# Altium PCB PCB.PcbDoc (part 3 of 3)
Units mm, origin at the board's own origin, x right, y up, seen from the top; angles counter-clockwise.
Board outline 68.58 x 53.34 mm, 4 copper layers (TOP, INNER1, INNER2, BOTTOM), stack 1.586 mm thick; 94 components, 161 nets, 536 pads, 304 vias.
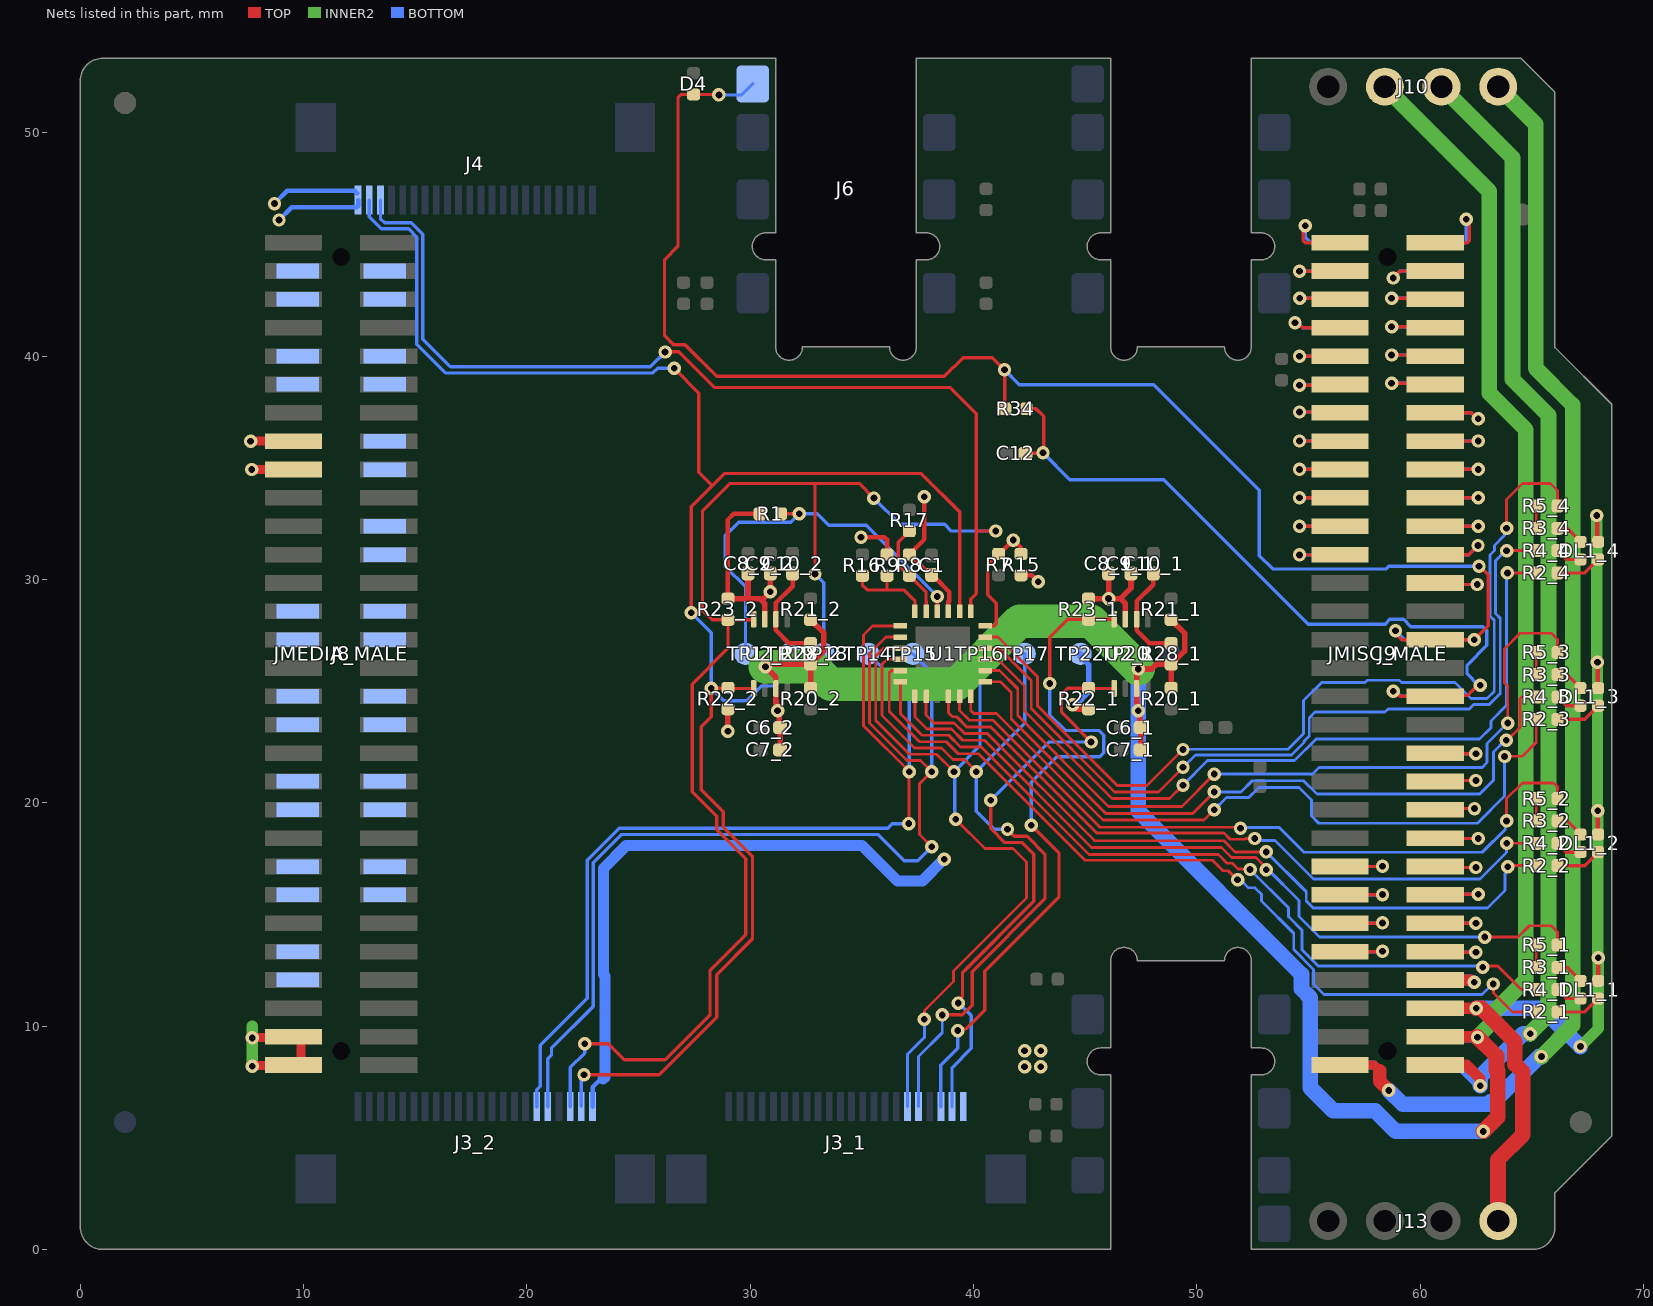
[diagram p5: the nets of this part, all layers, seen from the top]

## Via types
v1: diameter 0.6, hole 0.3, TOP to BOTTOM, tented both sides, 304 vias

## Nets (pads, with @x,y where several pads share a name; then routed paths per layer and width w, separated by ;. In a path a pad name is that pad's centre, name@x,y a point inside that pad or via, vN(x,y) a via of type N, cw(c..) or ccw(c..) an arc to the next point about the centre after c; other vN are vias at no path point) (continued)
MIC.BIAS: C12.2 J9.33 JMISC_MALE.33 R34.1 | length 35.7
  TOP w0.15: C12.2@42.33,35.646 42.342,35.658 43.101,35.658 v1(43.112,35.669) 43.145,35.702 43.145,37.3 42.799,37.646 R34.1@42.37,37.646 ; v1(58.8,25) 58.862,25 59.097,24.765 61.559,24.765 61.597,24.803 62.114,24.803 62.576,25.266 v1(62.69,25.266)
  BOTTOM w0.15: v1(43.112,35.669) 44.314,34.468 48.53,34.468 54.995,28.003 58.433,28.003 58.642,28.212 59.259,28.212 59.585,27.886 62.815,27.886 62.981,27.72 62.981,27.049 62.101,26.169 62.101,25.769 62.605,25.266 v1(62.69,25.266) ; v1(58.8,25) 58.896,25 59.131,24.765 J9.33@60.39,24.765
MIC.INP: D4.C J6.1 J9.29 JMISC_MALE.29 R34.2 | length 70.4
  TOP w0.15: v1(28.6,51.7) 28.58,51.72 D4.C@27.465,51.72 26.908,51.72 26.765,51.577 26.765,44.92 26.165,44.32 26.165,40.92 26.565,40.52 27.08,40.52 28.5,39.1 38.7,39.1 39.531,39.931 40.847,39.931 v1(41.388,39.39) 41.404,39.374 41.404,37.662 R34.2@41.42,37.646 ; v1(58.899,27.71) 58.899,27.595 59.097,27.397 59.097,27.393 59.185,27.305 JMISC_MALE.29@60.347,27.305 ; JMISC_MALE.29@60.682,27.305 60.691,27.296 v1(62.426,27.296) 63.058,27.929 63.058,29.984 63.058,30.214 62.675,30.597 v1(62.638,30.597)
  BOTTOM w0.15: v1(28.6,51.7) 29.62,51.7 J6.1@30.115,52.195 ; v1(41.388,39.39) 42.05,38.728 48.072,38.728 52.799,34.001 52.799,31.066 53.393,30.471 58.482,30.471 58.599,30.588 62.63,30.588 v1(62.638,30.597) ; v1(58.899,27.71) 59.304,27.305 J9.29@60.497,27.305 60.506,27.296 v1(62.426,27.296)
NetC10_1_2: C10_1.2 R28_1.1 U2_1.6 | length 4.6
  TOP w0.2: C10_1.2@48.053,30.27 48.053,29.77 47.303,29.02 U2_1.6@47.303,28.22 47.303,27.72 47.878,27.145 R28_1.1@48.853,27.145
NetC10_2_2: C10_2.2 R28_2.1 U2_2.6 | length 4.6
  TOP w0.2: C10_2.2@31.903,30.27 31.903,29.702 31.153,28.952 U2_2.6@31.153,28.22 31.153,27.72 31.728,27.145 R28_2.1@32.703,27.145
NetDL1_1_2: DL1_1.2 R2_1.2 | length 2.1
  TOP w0.15: R2_1.2@66.155,10.633 67.37,10.633 DL1_1.2@67.975,11.238
NetDL1_1_3: DL1_1.3 R4_1.2 | length 1.2
  TOP w0.15: R4_1.2@66.155,11.633 66.55,11.238 DL1_1.3@67.185,11.238
NetDL1_1_4: DL1_1.4 R3_1.2 | length 1.3
  TOP w0.15: R3_1.2@66.155,12.633 66.58,12.633 DL1_1.4@67.185,12.028
NetDL1_2_2: DL1_2.2 R2_2.2 | length 2.1
  TOP w0.15: R2_2.2@66.155,17.187 67.37,17.187 DL1_2.2@67.975,17.792
NetDL1_2_3: DL1_2.3 R4_2.2 | length 1.2
  TOP w0.15: R4_2.2@66.155,18.187 66.55,17.792 DL1_2.3@67.185,17.792
NetDL1_2_4: DL1_2.4 R3_2.2 | length 1.3
  TOP w0.15: R3_2.2@66.155,19.187 66.58,19.187 DL1_2.4@67.185,18.582
NetDL1_3_2: DL1_3.2 R2_3.2 | length 2.1
  TOP w0.15: R2_3.2@66.155,23.739 67.37,23.739 DL1_3.2@67.975,24.344
NetDL1_3_3: DL1_3.3 R4_3.2 | length 1.2
  TOP w0.15: R4_3.2@66.155,24.739 66.55,24.344 DL1_3.3@67.185,24.344
NetDL1_3_4: DL1_3.4 R3_3.2 | length 1.3
  TOP w0.15: R3_3.2@66.155,25.739 66.58,25.739 DL1_3.4@67.185,25.134
NetDL1_4_2: DL1_4.2 R2_4.2 | length 2.1
  TOP w0.15: R2_4.2@66.155,30.293 67.37,30.293 DL1_4.2@67.975,30.898
NetDL1_4_3: DL1_4.3 R4_4.2 | length 1.2
  TOP w0.15: R4_4.2@66.155,31.293 66.55,30.898 DL1_4.3@67.185,30.898
NetDL1_4_4: DL1_4.4 R3_4.2 | length 1.3
  TOP w0.15: R3_4.2@66.155,32.293 66.58,32.293 DL1_4.4@67.185,31.688
NetJ3_1_17: J3_1.17 TP16.X U1.3 | length 33.6
  TOP w0.127: U1.3@36.728,26.92 35.978,26.92 35.624,26.566 35.624,23.689 37.139,22.174 38.349,22.174 v1(39.128,21.395) ; v1(37.8,10.3) 37.8,10.7 39.103,12.003 39.103,12.464 42.376,15.737 42.376,17.343 41.764,17.955 40.509,17.955 v1(39.199,19.266)
  BOTTOM w0.127: J3_1.17@37.04,6.395 37.04,8.74 37.8,9.5 v1(37.8,10.3)
  BOTTOM w0.15: v1(39.199,19.266) 39.163,19.301 39.163,21.36 v1(39.128,21.395) 40.29,22.557 TP16.X@40.29,26.67
NetJ3_1_18: J3_1.18 TP17.X U1.4 | length 34.5
  TOP w0.127: U1.4@36.728,26.42 36.12,26.42 35.901,26.201 35.901,23.912 37.362,22.451 38.562,22.451 39.08,21.933 39.59,21.933 v1(40.128,21.395)
  TOP w0.15: v1(38.6,10.5) 39.5,10.5 39.939,10.939 39.939,12.439 43.2,15.7 43.2,17.7 42.402,18.498 41.834,18.498 v1(41.524,18.808)
  BOTTOM w0.127: J3_1.18@37.54,6.395 37.54,8.64 38.6,9.7 v1(38.6,10.5)
  BOTTOM w0.15: v1(41.524,18.808) 40.932,18.808 40.128,19.612 v1(40.128,21.395) 42.29,23.557 TP17.X@42.29,26.67
NetJ3_1_20: J3_1.20 R23_1.1 U2_1.8 | length 31.5
  TOP w0.15: v1(39.3,9.798) 39.372,9.87 39.67,9.87 40.5,10.7 40.5,12.455 43.83,15.785 43.83,17.743 v1(42.583,18.99) ; v1(43.41,25.34) 43.41,27.41 44.22,28.22 U2_1.8@46.303,28.22
  BOTTOM w0.15: J3_1.20@38.54,6.395 38.54,8.24 39.3,9 v1(39.3,9.798) ; v1(42.583,18.99) 42.583,20.923 43.728,22.068 45.66,22.068 45.84,22.248 45.84,23.018 45.618,23.24 44.1,23.24 43.41,23.93 v1(43.41,25.34)
NetJ3_1_21: J3_1.21 R22_1.1 U2_1.1 | length 27.7
  TOP w0.15: v1(39.32,11.03) 39.32,11.152 39.508,11.34 39.508,12.4 42.7,15.592 42.7,17.7 42.179,18.221 41.401,18.221 40.77,18.852 v1(40.77,20.117) ; R22_1.1@45.135,25.128 44.228,25.128 43.941,24.841 43.941,24.045 v1(45.266,22.721) ; R22_1.1@45.178,25.12 U2_1.1@46.303,25.12
  BOTTOM w0.15: J3_1.21@39.04,6.395 39.04,8.14 39.9,9 39.9,10.474 39.344,11.03 v1(39.32,11.03) ; v1(40.77,20.117) 43.374,22.721 v1(45.266,22.721)
NetJ3_2_17: J3_2.17 TP14.X U1.1 | length 44.2
  TOP w0.127: U1.1@36.728,27.92 35.478,27.92 35.07,27.512 35.07,23.453 v1(37.128,21.395) 37.112,21.379 37.112,19.084 v1(37.096,19.068)
  BOTTOM w0.15: J3_2.17@20.44,6.395 20.44,7.145 20.6,7.305 20.6,9.136 22.7,11.236 22.7,17.433 24.126,18.859 36.154,18.859 36.363,19.068 v1(37.096,19.068) ; TP14.X@35.29,26.67 37.128,24.832 v1(37.128,21.395)
NetJ3_2_18: J3_2.18 TP15.X U1.2 | length 46.1
  TOP w0.127: U1.2@36.728,27.42 36.086,27.42 35.347,26.681 35.347,23.575 37.024,21.897 37.626,21.897 v1(38.128,21.395) 37.587,20.854 37.587,18.578 v1(38.132,18.032)
  BOTTOM w0.15: J3_2.18@20.94,6.395 20.94,8.54 21.1,8.7 21.1,9 22.977,10.877 22.977,17.318 24.241,18.582 35.721,18.582 36.903,17.4 37.5,17.4 v1(38.132,18.032) ; TP15.X@37.29,26.67 38.128,25.832 v1(38.128,21.395)
NetJ3_2_20: J3_2.20 J4.20 R23_2.1 TP18.X U1.19 U2_2.8 | length 103.4
  TOP w0.15: v1(22.589,9.204) 23.644,9.204 24.361,8.486 26.186,8.486 28.2,10.5 28.2,12.5 29.8,14.1 29.8,17.5 28.5,18.8 28.5,19.4 27.4,20.5 27.4,25.315 29.003,26.918 R23_2.1@29.003,28.195 ; v1(26.188,40.188) 26.2,40.2 26.8,40.2 28.4,38.6 38.945,38.6 40.128,37.418 40.128,32.17 ; U2_2.8@30.153,28.22 30.128,28.195 R23_2.1@29.003,28.195 ; v1(32.903,30.245) 32.903,34.297 32.9,34.3 ; v1(35.541,33.646) 34.886,34.3 32.9,34.3 ; U1.19@39.878,28.57 39.878,29.12 40.128,29.37 40.128,32.17 ; v1(41.003,32.17) 40.128,32.17 ; R23_2.1@29.003,28.195 28.29,28.195 27.863,28.622 27.863,33.063 29.1,34.3 32.9,34.3
  BOTTOM w0.15: J4.20@13.44,46.995 13.44,46.16 13.623,45.977 14.823,45.977 15.341,45.459 15.341,40.759 16.575,39.525 25.525,39.525 v1(26.188,40.188) ; J3_2.20@21.94,6.395 21.94,7.348 21.944,7.352 21.944,8.146 22.589,8.791 v1(22.589,9.204) ; v1(32.903,30.245) 33.29,29.858 TP18.X@33.29,26.67 ; v1(35.541,33.646) 36.716,32.47 38.703,32.47 39.003,32.17 v1(41.003,32.17)
NetJ3_2_21: J3_2.21 J4.21 R22_2.1 TP19.X U1.20 U2_2.1 | length 84.5
  TOP w0.15: v1(22.559,7.818) 25.918,7.818 28.5,10.4 28.5,12.3 30.1,13.9 30.1,17.6 28.8,18.9 28.8,19.59 27.8,20.59 27.8,23.4 28.251,23.851 v1(28.251,25.135) 28.993,25.135 R22_2.1@29.003,25.145 29.028,25.12 U2_2.1@30.153,25.12 ; v1(26.593,39.458) 27.7,38.35 27.7,34.8 28.3,34.2 ; v1(27.358,28.507) 27.358,33.258 28.3,34.2 ; U1.20@39.378,28.57 39.378,33.022 37.655,34.745 28.845,34.745 28.3,34.2
  BOTTOM w0.15: J4.21@12.94,46.995 12.94,46.245 13.485,45.7 14.7,45.7 15.064,45.336 15.064,40.536 16.352,39.248 25.64,39.248 25.85,39.458 v1(26.593,39.458) ; J3_2.21@22.44,6.395 22.44,7.576 22.559,7.696 v1(22.559,7.818) ; v1(27.358,28.507) 28.251,27.613 v1(28.251,25.135) 28.817,24.57 29.843,24.57 30.5,25.227 31.075,25.227 31.79,25.942 TP19.X@31.79,26.67
NetJ8_3: J8.3
NetJ8_4: J8.4
NetJ8_5: J8.5
NetJ8_6: J8.6
NetJ8_9: J8.9
NetJ8_10: J8.10
NetJ8_11: J8.11
NetJ8_12: J8.12
NetJ8_15: J8.15
NetJ8_16: J8.16 JMEDIA_MALE.16 | length 3.7
  TOP w0.4: 7.925,36.195 JMEDIA_MALE.16@9.626,36.195
  BOTTOM w0.15: 7.925,36.195 J8.16@9.884,36.195
  other v1: 7.625,36.195
NetJ8_17: J8.17
NetJ8_18: J8.18 JMEDIA_MALE.18 | length 3.7
  TOP w0.4: 7.983,34.925 JMEDIA_MALE.18@9.684,34.925
  BOTTOM w0.15: 7.983,34.925 J8.18@9.942,34.925
  other v1: 7.683,34.925
NetJ8_21: J8.21
NetJ8_23: J8.23
NetJ8_27: J8.27
NetJ8_28: J8.28
NetJ8_29: J8.29
NetJ8_30: J8.30
NetJ8_33: J8.33
NetJ8_34: J8.34
NetJ8_35: J8.35
NetJ8_36: J8.36
NetJ8_39: J8.39
NetJ8_40: J8.40
NetJ8_41: J8.41
NetJ8_42: J8.42
NetJ8_45: J8.45
NetJ8_46: J8.46
NetJ8_47: J8.47
NetJ8_48: J8.48
NetJ8_52: J8.52
NetJ8_54: J8.54
NetJ9_1: J9.1 JMISC_MALE.1 | length 5.5
  TOP w0.15: JMISC_MALE.1@60.347,45.085 62.12,45.085 62.208,45.173 62.208,45.868 62.062,46.014 v1(62.062,46.136)
  BOTTOM w0.15: J9.1@60.497,45.085 60.521,45.061 61.974,45.061 62.062,45.149 v1(62.062,46.136)
NetJ9_2: J9.2 JMISC_MALE.2 | length 5.1
  TOP w0.15: 54.77,45.527 54.77,45.173 54.858,45.085 JMISC_MALE.2@56.747,45.085 ; 54.77,45.527 54.77,45.753 v1(54.856,45.839)
  BOTTOM w0.15: v1(54.856,45.839) 54.856,45.33 55.102,45.085 J9.2@56.597,45.085
NetJ9_3: J9.3 JMISC_MALE.3 | length 3.3
  TOP w0.15: v1(58.8,43.5) 59.115,43.815 JMISC_MALE.3@60.347,43.815
  BOTTOM w0.15: v1(58.8,43.5) 59.115,43.815 J9.3@60.29,43.815
NetJ9_4: J9.4 JMISC_MALE.4 | length 4.1
  TOP w0.15: v1(54.6,43.8) JMISC_MALE.4@56.609,43.8
  BOTTOM w0.15: v1(54.6,43.8) J9.4@56.667,43.8
NetJ9_5: J9.5 JMISC_MALE.5 | length 3.2
  TOP w0.15: v1(58.722,42.595) 60.297,42.595 JMISC_MALE.5@60.347,42.545
  BOTTOM w0.15: v1(58.722,42.595) 60.24,42.595 J9.5@60.29,42.545
NetJ9_6: J9.6 JMISC_MALE.6 | length 4.4
  TOP w0.15: v1(54.617,42.6) 56.692,42.6 JMISC_MALE.6@56.747,42.545
  BOTTOM w0.15: v1(54.617,42.6) 56.75,42.6 J9.6@56.805,42.545
NetJ9_7: J9.7 JMISC_MALE.7 | length 3.2
  TOP w0.15: v1(58.722,41.325) 60.297,41.325 JMISC_MALE.7@60.347,41.275
  BOTTOM w0.15: v1(58.722,41.325) 60.24,41.325 J9.7@60.29,41.275
NetJ9_8: J9.8 JMISC_MALE.8 | length 4.9
  TOP w0.15: v1(54.4,41.5) 54.516,41.5 54.741,41.275 JMISC_MALE.8@56.747,41.275
  BOTTOM w0.15: v1(54.4,41.5) 54.516,41.5 54.741,41.275 J9.8@56.805,41.275
NetJ9_9: J9.9 JMISC_MALE.9 | length 3.2
  TOP w0.15: v1(58.722,40.055) 60.297,40.055 JMISC_MALE.9@60.347,40.005
  BOTTOM w0.15: v1(58.722,40.055) 60.24,40.055 J9.9@60.29,40.005
NetJ9_10: J9.10 JMISC_MALE.10 | length 4.4
  TOP w0.15: v1(54.6,40) 56.742,40 JMISC_MALE.10@56.747,40.005
  BOTTOM w0.15: v1(54.6,40) 56.8,40 J9.10@56.805,40.005
NetJ9_11: J9.11 JMISC_MALE.11 | length 3.2
  TOP w0.15: v1(58.722,38.785) 60.297,38.785 JMISC_MALE.11@60.347,38.735
  BOTTOM w0.15: v1(58.722,38.785) 60.24,38.785 J9.11@60.29,38.735
NetJ9_12: J9.12 JMISC_MALE.12 | length 4.4
  TOP w0.15: v1(54.6,38.7) 56.712,38.7 JMISC_MALE.12@56.747,38.735
  BOTTOM w0.15: v1(54.6,38.7) 56.77,38.7 J9.12@56.805,38.735
NetJ9_13: J9.13 JMISC_MALE.13 | length 4.8
  TOP w0.15: JMISC_MALE.13@60.347,37.465 62.299,37.465 62.564,37.2 v1(62.6,37.2)
  BOTTOM w0.15: J9.13@60.29,37.465 62.299,37.465 62.564,37.2 v1(62.6,37.2)
NetJ9_14: J9.14 JMISC_MALE.14 | length 4.4
  TOP w0.15: v1(54.6,37.5) 56.712,37.5 JMISC_MALE.14@56.747,37.465
  BOTTOM w0.15: v1(54.6,37.5) 56.77,37.5 J9.14@56.805,37.465
NetJ9_15: J9.15 JMISC_MALE.15 | length 4.6
  TOP w0.15: JMISC_MALE.15@60.347,36.195 60.352,36.2 v1(62.6,36.2)
  BOTTOM w0.15: J9.15@60.29,36.195 60.295,36.2 v1(62.6,36.2)
NetJ9_17: J9.17 JMISC_MALE.17 | length 4.6
  TOP w0.15: JMISC_MALE.17@60.347,34.925 60.352,34.93 v1(62.6,34.93)
  BOTTOM w0.15: J9.17@60.29,34.925 60.295,34.93 v1(62.6,34.93)
NetJ9_19: J9.19 JMISC_MALE.19 | length 4.6
  TOP w0.15: JMISC_MALE.19@60.347,33.655 60.352,33.66 v1(62.6,33.66)
  BOTTOM w0.15: J9.19@60.29,33.655 60.295,33.66 v1(62.6,33.66)
NetJ9_20: J9.20 JMISC_MALE.20 | length 4.4
  TOP w0.15: v1(54.6,33.66) 56.742,33.66 JMISC_MALE.20@56.747,33.655
  BOTTOM w0.15: v1(54.6,33.66) 56.8,33.66 J9.20@56.805,33.655
NetJ9_21: J9.21 JMISC_MALE.21 | length 4.6
  TOP w0.15: JMISC_MALE.21@60.347,32.385 60.352,32.39 v1(62.6,32.39)
  BOTTOM w0.15: J9.21@60.29,32.385 60.295,32.39 v1(62.6,32.39)
NetJ9_22: J9.22 JMISC_MALE.22 | length 4.4
  TOP w0.15: v1(54.6,32.39) 56.742,32.39 JMISC_MALE.22@56.747,32.385
  BOTTOM w0.15: v1(54.6,32.39) 56.8,32.39 J9.22@56.805,32.385
NetJ9_23: J9.23 JMISC_MALE.23 | length 4.9
  TOP w0.15: JMISC_MALE.23@60.347,31.115 62.185,31.115 v1(62.594,31.523)
  BOTTOM w0.15: J9.23@60.29,31.115 62.185,31.115 v1(62.594,31.523)
NetJ9_24: J9.24 JMISC_MALE.24 | length 4.4
  TOP w0.15: v1(54.6,31.1) 56.732,31.1 JMISC_MALE.24@56.747,31.115
  BOTTOM w0.15: v1(54.6,31.1) 56.79,31.1 J9.24@56.805,31.115
NetJ9_25: J9.25 JMISC_MALE.25 | length 4.5
  TOP w0.15: JMISC_MALE.25@60.347,29.845 60.416,29.776 v1(62.556,29.776)
  BOTTOM w0.15: J9.25@60.29,29.845 60.359,29.776 v1(62.556,29.776)
NetJ9_37: J9.37 JMISC_MALE.37 | length 4.3
  TOP w0.15: JMISC_MALE.37@60.404,22.225 60.429,22.2 v1(62.5,22.2)
  BOTTOM w0.15: J9.37@60.347,22.225 60.372,22.2 v1(62.5,22.2)
NetJ9_39: J9.39 JMISC_MALE.39 | length 4.3
  TOP w0.15: JMISC_MALE.39@60.404,20.955 60.449,21 v1(62.5,21)
  BOTTOM w0.15: J9.39@60.347,20.955 60.392,21 v1(62.5,21)
NetJ9_41: J9.41 JMISC_MALE.41 | length 4.2
  TOP w0.15: JMISC_MALE.41@60.404,19.685 60.46,19.741 v1(62.436,19.741)
  BOTTOM w0.15: J9.41@60.347,19.685 60.403,19.741 v1(62.436,19.741)
NetJ9_43: J9.43 JMISC_MALE.43 | length 4.5
  TOP w0.15: JMISC_MALE.43@60.404,18.415 60.419,18.4 v1(62.6,18.4)
  BOTTOM w0.15: J9.43@60.347,18.415 60.362,18.4 v1(62.6,18.4)
NetJ9_45: J9.45 JMISC_MALE.45 | length 4.3
  TOP w0.15: JMISC_MALE.45@60.404,17.145 60.449,17.1 v1(62.5,17.1)
  BOTTOM w0.15: J9.45@60.347,17.145 60.392,17.1 v1(62.5,17.1)
NetJ9_46: J9.46 JMISC_MALE.46 | length 3.2
  TOP w0.15: JMISC_MALE.46@56.762,17.145 58.3,17.145 v1(58.315,17.16)
  BOTTOM w0.15: J9.46@56.705,17.145 58.299,17.145 v1(58.315,17.16)
NetJ9_47: J9.47 JMISC_MALE.47 | length 4.5
  TOP w0.15: JMISC_MALE.47@60.404,15.875 60.429,15.9 v1(62.6,15.9)
  BOTTOM w0.15: J9.47@60.347,15.875 60.372,15.9 v1(62.6,15.9)
NetJ9_48: J9.48 JMISC_MALE.48 | length 3.2
  TOP w0.15: JMISC_MALE.48@56.762,15.875 58.3,15.875 v1(58.315,15.89)
  BOTTOM w0.15: J9.48@56.705,15.875 58.299,15.875 v1(58.315,15.89)
NetJ9_49: J9.49 JMISC_MALE.49 | length 4.3
  TOP w0.15: JMISC_MALE.49@60.404,14.605 60.409,14.6 v1(62.5,14.6)
  BOTTOM w0.15: J9.49@60.347,14.605 60.352,14.6 v1(62.5,14.6)
NetJ9_50: J9.50 JMISC_MALE.50 | length 3.2
  TOP w0.15: JMISC_MALE.50@56.762,14.605 58.3,14.605 v1(58.315,14.62)
  BOTTOM w0.15: J9.50@56.705,14.605 58.299,14.605 v1(58.315,14.62)
NetJ9_51: J9.51 JMISC_MALE.51 | length 4.3
  TOP w0.15: JMISC_MALE.51@60.404,13.335 60.439,13.3 v1(62.5,13.3)
  BOTTOM w0.15: J9.51@60.347,13.335 60.382,13.3 v1(62.5,13.3)
NetJ9_52: J9.52 JMISC_MALE.52 | length 3.2
  TOP w0.15: JMISC_MALE.52@56.762,13.335 58.3,13.335 v1(58.315,13.35)
  BOTTOM w0.15: J9.52@56.705,13.335 58.299,13.335 v1(58.315,13.35)
NetR1_1: R1.1 TP1.X U1.22 | length 18.6
  TOP w0.15: R1.1@31.378,32.94 v1(32.203,32.94) ; U1.22@38.378,28.57 v1(38.378,29.239)
  BOTTOM w0.15: TP1.X@29.79,26.67 29.79,29.67 28.89,30.57 28.89,31.97 29.481,32.561 31.823,32.561 v1(32.203,32.94) 33.003,32.94 33.522,32.421 35.204,32.421 35.524,32.101 35.524,32.093 v1(38.378,29.239)
NetR2_1_1: R2_1.1 U1.5 | length 38.4
  TOP w0.127: U1.5@36.728,25.92 36.32,25.92 36.226,25.826 36.226,24.087 37.58,22.733 38.78,22.733 39.314,22.199 40.226,22.199 44.999,17.426 50.704,17.426 51.171,16.96 51.409,16.96 51.817,16.552 v1(51.825,16.552) ; v1(63.28,11.886) 63.286,11.88 63.286,11.486 64.139,10.633 R2_1.1@65.205,10.633
  BOTTOM w0.127: v1(51.825,16.552) 51.948,16.552 52.308,16.192 52.604,16.192 52.892,15.904 52.892,15.608 54.342,14.158 54.342,13.426 55.228,12.54 55.228,11.89 55.701,11.416 62.767,11.416 63.237,11.886 v1(63.28,11.886)
NetR2_2_1: R2_2.1 U1.8 | length 33.4
  TOP w0.127: U1.8@37.878,24.77 37.878,23.935 38.237,23.576 39.132,23.576 39.609,23.099 40.618,23.099 45.414,18.303 51.204,18.303 51.707,17.8 v1(53.113,17.8) ; v1(63.927,17.133) 63.98,17.187 R2_2.1@65.205,17.187
  BOTTOM w0.127: v1@53.113,17.731 v1(53.113,17.8) 54.9,16.013 54.9,15.6 55.214,15.286 63.025,15.286 63.807,16.069 63.807,16.823 63.837,16.852 63.837,17.043 v1(63.927,17.133)
NetR2_3_1: R2_3.1 U1.12 | length 33.3
  TOP w0.127: U1.12@39.878,24.77 39.878,24.135 40.014,23.999 41.023,23.999 45.796,19.226 50.32,19.226 v1(50.78,19.686) ; v1(63.782,22.075) 63.794,22.086 64.58,22.086 65.205,22.711 R2_3.1@65.205,23.739
  BOTTOM w0.127: v1(50.78,19.686) 51.325,20.232 52.325,20.232 52.78,20.686 54.58,20.686 55.136,20.13 55.136,19.413 55.463,19.086 62.566,19.086 63.78,20.301 63.78,22.072 v1(63.782,22.075)
NetR2_4_1: R2_4.1 U1.15 | length 35.7
  TOP w0.127: U1.15@40.528,26.42 41.092,26.42 42.276,25.236 42.276,24.109 46.195,20.19 48.783,20.19 v1(49.38,20.786) ; v1(63.91,30.293) R2_4.1@65.205,30.293
  BOTTOM w0.127: v1(49.38,20.786) 50.48,21.886 54.38,21.886 55.348,22.854 62.66,22.854 63.168,23.363 63.168,23.663 63.873,24.368 63.873,30.256 v1(63.91,30.293)
NetR3_1_1: R3_1.1 R5_1.1 | length 1
  TOP w0.127: R3_1.1@65.205,12.633 R5_1.1@65.205,13.633
NetR3_2_1: R3_2.1 R5_2.1 | length 1
  TOP w0.127: R3_2.1@65.205,19.187 R5_2.1@65.205,20.187
NetR3_3_1: R3_3.1 R5_3.1 | length 1
  TOP w0.127: R3_3.1@65.205,25.739 R5_3.1@65.205,26.739
NetR3_4_1: R3_4.1 R5_4.1 | length 1
  TOP w0.127: R3_4.1@65.205,32.293 R5_4.1@65.205,33.293
NetR4_1_1: R4_1.1 U1.6 | length 35.8
  TOP w0.127: U1.6@36.728,25.42 36.728,23.985 37.691,23.022 38.891,23.022 39.414,22.499 40.349,22.499 45.167,17.68 50.972,17.68 51.36,17.292 51.599,17.292 51.849,17.042 52.358,17.042 v1(52.387,17.013) ; v1(62.807,12.641) 62.853,12.686 63.48,12.686 64.533,11.633 R4_1.1@65.205,11.633
  BOTTOM w0.127: v1(52.387,17.013) 54.1,15.3 54.1,14.9 54.708,14.292 54.708,13.419 55.44,12.686 62.762,12.686 v1(62.807,12.641)
NetR4_2_1: R4_2.1 U1.10 | length 31.1
  TOP w0.127: U1.10@38.878,24.77 38.878,24.035 39.06,23.853 39.247,23.853 39.7,23.399 40.772,23.399 45.521,18.651 51.216,18.651 51.498,18.368 52.162,18.368 52.194,18.4 v1(52.6,18.4) ; v1(63.877,18.183) 63.88,18.187 R4_2.1@65.205,18.187
  BOTTOM w0.127: v1(52.6,18.4) 52.689,18.311 53.506,18.311 55.231,16.586 55.786,16.586 55.788,16.584 62.684,16.584 63.874,17.774 63.874,18.18 v1(63.877,18.183)
NetR4_3_1: R4_3.1 U1.13 | length 32
  TOP w0.127: U1.13@40.528,25.42 41.206,25.42 41.694,24.932 41.694,23.754 45.921,19.527 49.82,19.527 v1(50.78,20.486) ; v1(63.862,22.797) 63.891,22.797 64.468,23.374 64.468,24.665 64.542,24.739 R4_3.1@65.205,24.739
  BOTTOM w0.127: v1(50.78,20.486) 51.98,20.486 52.48,20.986 54.78,20.986 55.38,20.386 62.669,20.386 63.293,21.011 63.293,21.644 63.292,21.645 63.292,22.278 63.811,22.797 v1(63.862,22.797)
NetR4_4_1: R4_4.1 U1.16 | length 36.8
  TOP w0.127: U1.16@40.528,26.92 41.138,26.92 42.586,25.472 42.586,24.225 46.32,20.491 48.284,20.491 v1(49.38,21.586) ; v1(63.873,31.293) R4_4.1@65.205,31.293
  BOTTOM w0.127: v1(49.38,21.586) 49.936,22.142 54.236,22.142 54.801,22.707 54.801,22.754 55.034,22.988 55.034,23.802 55.295,24.062 58.434,24.062 58.576,24.204 62.204,24.204 62.4,24.4 63.1,24.4 63.587,24.887 63.587,28.267 63.383,28.471 63.383,30.841 63.834,31.293 v1(63.873,31.293)
NetR5_1_2: R5_1.2 U1.7 | length 35.2
  TOP w0.127: U1.7@37.378,24.77 37.378,23.835 37.914,23.299 39.017,23.299 39.517,22.799 40.49,22.799 45.288,18.001 51.099,18.001 51.554,17.546 52.654,17.546 53.113,17.087 v1(53.113,17) ; v1(62.89,13.986) 64.38,13.986 64.887,14.493 65.88,14.493 66.155,14.218 R5_1.2@66.155,13.633
  BOTTOM w0.127: v1(53.113,17) 53.2,17 54.571,15.629 54.571,14.908 55.493,13.986 v1(62.89,13.986)
NetR5_2_2: R5_2.2 U1.11 | length 32.7
  TOP w0.127: U1.11@39.378,24.77 39.378,24.139 39.817,23.699 40.869,23.699 45.663,18.905 51.913,18.905 v1(51.959,18.859) ; v1(63.874,19.187) 63.874,20.187 64.58,20.893 65.98,20.893 66.155,20.718 R5_2.2@66.155,20.187
  BOTTOM w0.127: v1(51.959,18.859) 52,18.9 53.689,18.9 54.803,17.786 62.786,17.786 63.81,18.81 63.81,19.123 v1(63.874,19.187)
NetR5_3_2: R5_3.2 U1.14 | length 35.4
  TOP w0.127: U1.14@40.528,25.92 41.167,25.92 41.978,25.108 41.978,23.914 46.051,19.841 49.335,19.841 v1(50.78,21.286) ; v1(63.922,23.57) 63.922,25.225 63.78,25.366 63.78,26.893 64.48,27.593 65.88,27.593 66.155,27.318 R5_3.2@66.155,26.739
  BOTTOM w0.127: v1(50.78,21.286) 55.18,21.286 55.48,21.586 62.786,21.586 63,21.8 63,22.648 v1(63.922,23.57)
NetR5_4_2: R5_4.2 U1.17 | length 42
  TOP w0.127: U1.17@40.528,27.42 41.093,27.42 42.866,25.647 42.866,24.347 46.438,20.775 47.769,20.775 v1(49.38,22.386) ; v1(63.873,32.293) 63.873,33.587 64.58,34.293 65.846,34.293 66.155,33.984 R5_4.2@66.155,33.293
  BOTTOM w0.127: v1(49.38,22.386) 49.39,22.396 54.083,22.396 54.78,23.093 54.78,24.576 55.597,25.393 57.539,25.393 57.637,25.491 59.062,25.491 59.166,25.386 61.56,25.386 62.283,24.664 62.995,24.664 63.322,24.991 63.322,28.173 63.129,28.366 63.129,31.096 63.326,31.293 63.326,31.526 63.783,31.983 63.783,32.202 v1(63.873,32.293)
NetR7_1: R7.1 R15.2 U1.18 | length 5.7
  TOP w0.15: U1.18@40.528,27.92 40.928,27.92 41.016,28.008 41.016,28.934 40.636,29.314 40.636,30.668 41.113,31.145 R7.1@41.128,31.145
  TOP w0.18: v1(41.785,31.766) 42.128,31.423 R15.2@42.128,31.145
  TOP w0.2: R7.1@41.128,31.145 41.154,31.145 41.775,31.766 v1(41.785,31.766)
NetR8_2: R8.2 R17.1 U1.23 | length 4.3
  TOP w0.15: R17.1@37.128,32.17 36.636,31.678 36.636,30.662 R8.2@37.128,30.17 37.143,30.17 37.876,29.437 37.876,29.031 37.878,29.029 U1.23@37.878,28.57
NetR9_2: R9.2 R16.1 U1.24 | length 4.2
  TOP w0.15: R16.1@35.028,30.17 35.028,29.745 35.242,29.531 36.128,29.531 ; R9.2@36.128,30.17 36.128,29.531 ; U1.24@37.378,28.57 37.378,29.039 36.886,29.531 36.128,29.531
PF14: J9.16 JMISC_MALE.16 | length 4.4
  TOP w0.15: v1(54.6,36.2) 56.742,36.2 JMISC_MALE.16@56.747,36.195
  BOTTOM w0.15: v1(54.6,36.2) 56.8,36.2 J9.16@56.805,36.195
PF15: J9.18 JMISC_MALE.18 | length 4.4
  TOP w0.15: v1(54.6,34.93) 56.742,34.93 JMISC_MALE.18@56.747,34.925
  BOTTOM w0.15: v1(54.6,34.93) 56.8,34.93 J9.18@56.805,34.925
PWR_3P3V: C1.2 C8_1.2 C8_2.2 C9_1.1 C9_2.1 DL1_1.1 DL1_2.1 DL1_3.1 DL1_4.1 J3_1.22 J3_2.22 J4.22 J8.58 J8.60 J9.53 J9.55 J13.1 JMEDIA_MALE.58 JMEDIA_MALE.60 JMISC_MALE.53 JMISC_MALE.55 R1.2 R8.1 R9.1 R15.1 R22_1.2 R22_2.2 R23_1.2 R23_2.2 TP22.X U1.21 U2_1.7 U2_2.7 | length 127.4
  TOP w0.2: R23_2.2@29.003,29.145 29.003,32.683 29.26,32.94 R1.2@30.428,32.94 ; v1(34.963,31.885) 34.971,31.893 36.011,31.893 36.128,31.776 R9.1@36.128,31.12 ; v1(37.8,33.7) 37.8,31.792 R8.1@37.128,31.12 38.038,30.21 C1.2@38.128,30.21 38.312,30.026 38.336,30.026 38.905,29.458 38.905,29.021 38.878,28.994 U1.21@38.878,28.57 ; R15.1@42.128,30.195 42.605,30.195 v1(42.9,29.9) ; v1(67.912,32.864) 67.943,32.832 67.943,31.719 DL1_4.1@67.975,31.688 ; v1(67.941,26.3) 67.958,26.283 67.958,25.151 DL1_3.1@67.975,25.134 ; v1(67.954,19.642) 67.964,19.631 67.964,18.592 DL1_2.1@67.975,18.582 ; DL1_1.1@67.975,12.028 67.976,12.03 v1(67.977,13.065) v1(67.977,13.065)
  TOP w0.25: v1(29.003,23.203) R22_2.2@29.003,24.195 ; R23_2.2@29.003,29.145 29.9,29.145 ; C8_2.2@29.903,30.27 29.903,29.148 29.9,29.145 ; U2_2.7@30.653,28.22 30.653,28.92 30.514,29.059 ; C9_2.1@30.903,30.27 v1(30.903,29.448) 30.514,29.059 ; v1(44.443,24.387) 44.635,24.195 R22_1.2@45.153,24.195 ; R23_1.2@45.153,29.145 v1(46.05,29.145) ; C8_1.2@46.053,30.27 46.053,29.148 v1(46.05,29.145) ; U2_1.7@46.803,28.22 46.803,28.92 46.578,29.145 ; C9_1.1@47.053,30.27 47.053,29.62 46.578,29.145 ; 29.9,29.145 30.428,29.145 30.514,29.059 ; v1(46.05,29.145) 46.578,29.145
  TOP w0.4: v1(7.7,8.2) 7.728,8.227 9.857,8.227 9.884,8.255 9.884,9.525 9.857,9.497 7.728,9.497 v1(7.7,9.47)
  TOP w0.5: JMISC_MALE.55@60.682,10.795 v1@62.51,10.795 ; JMISC_MALE.53@60.682,12.065 62.243,12.065 62.323,11.985 62.404,11.985 v1(62.423,11.966)
  TOP w0.7: v1@62.51,10.795 v1(62.513,10.799) 62.747,10.799 64.246,9.3 64.246,8.299 64.603,7.941 64.603,5.133 63.49,4.02 63.49,1.28 J13.1@63.5,1.27
  INNER2 w0.5: v1(7.7,8.2) v1(7.7,9.47) 7.7,10 ; v1(67.18,9.086) 67.98,9.886 67.98,13.062 v1(67.977,13.065) ; v1@67.912,26.329 67.922,26.339 67.922,26.389 67.912,26.4 v1(67.912,32.864) ; v1@67.941,19.654 v1(67.941,26.3) ; v1@67.954,13.089 67.958,13.093 67.958,13.155 67.954,13.159 v1(67.954,19.642)
  BOTTOM w0.2: v1(8.696,46.835) 9.272,47.41 12.28,47.41 ; v1(8.898,46.1) 9.464,46.666 12.39,46.666 12.44,46.716 J4.22@12.44,46.995 ; J4.22@12.39,47.3 J4.22@12.4,47.3 ; J3_2.22@22.94,6.395 22.94,7.266 23.298,7.623 23.414,7.623
  BOTTOM w0.25: v1(7.7,8.2) 7.727,8.227 9.915,8.227 J8.60@9.942,8.255 ; v1(7.7,9.47) 7.727,9.497 9.915,9.497 J8.58@9.942,9.525 ; v1(44.443,24.387) 44.578,24.387 45.153,24.962 45.153,26.184 44.79,26.547 TP22.X@44.79,26.67
  BOTTOM w0.5: 23.414,7.623 23.495,7.704 23.495,12.243 23.429,12.309 23.429,17.06 24.449,18.08 35.006,18.08 36.59,16.497 37.706,16.497 v1(38.687,17.478) ; J9.55@61.097,10.795 v1@62.51,10.795 ; J9.53@61.097,12.065 62.285,12.065 62.384,11.966 v1(62.423,11.966)
  BOTTOM w0.7: v1@62.51,10.795 v1(62.513,10.799) 65.468,10.799 v1(67.18,9.086)
  other v1: 42.288,8.173 43.015,8.173 42.288,8.9 43.015,8.9
VBAT: J9.60 J10.1 JMISC_MALE.60 | length 59.1
  TOP w0.4: JMISC_MALE.60@56.412,8.255 57.945,8.255 58.2,8
  TOP w0.6: 58.2,8 58.2,7.519 v1(58.6,7.119)
  INNER2 w0.7: J10.1@63.5,52.07 65.181,50.389 65.181,39.464 66.832,37.813 66.832,10.036 v1(65.434,8.638)
  BOTTOM w0.4: J9.60@56.597,8.255 57.945,8.255 58.228,7.972 58.228,7.492 v1(58.6,7.119)
  BOTTOM w0.7: v1(58.6,7.119) 59.215,6.504 63.04,6.504 63.138,6.602 63.302,6.602 65.338,8.638 v1(65.434,8.638)
VCC_PX3_1P8: C6_1.2 C6_2.2 C7_1.1 C7_2.1 J9.57 J10.3 JMISC_MALE.57 R20_1.2 R20_2.2 R21_1.2 R21_2.2 R28_1.2 R28_2.2 TP20.X U2_1.3 U2_2.3 | length 123.6
  TOP w0.25: C7_2.1@31.338,22.37 C6_2.2@31.338,23.37 31.294,23.414 31.294,24.071 31.238,24.127 v1(31.226,24.127) 31.183,24.17 31.183,24.422 31.157,24.448 31.157,24.567 31.153,24.571 U2_2.3@31.153,25.12 31.153,25.622 v1(30.682,26.093) 30.785,26.195 31.328,26.195 R28_2.2@32.703,26.195 ; R20_2.2@32.703,25.145 R28_2.2@32.703,26.195 ; R21_2.2@32.703,28.195 33.302,27.596 33.302,26.794 R28_2.2@32.703,26.195 ; C7_1.1@47.488,22.37 C6_1.2@47.488,23.37 47.444,23.414 47.444,24.071 47.388,24.127 v1(47.376,24.127) 47.333,24.17 47.333,24.422 47.307,24.448 47.307,24.567 47.303,24.571 U2_1.3@47.303,25.12 47.303,25.817 47.383,25.897 v1(47.383,25.992) 47.98,25.992 48.183,26.195 R28_1.2@48.853,26.195 ; R20_1.2@48.853,25.145 R28_1.2@48.853,26.195 ; R21_1.2@48.853,28.195 49.452,27.596 49.452,26.794 R28_1.2@48.853,26.195
  TOP w0.5: JMISC_MALE.57@60.347,9.525 v1@62.552,9.525
  TOP w0.7: v1@62.552,9.525 63.419,8.658 63.419,8.049 63.474,7.994 63.474,5.926 v1(62.832,5.283)
  INNER2 w0.7: J10.3@58.42,52.07 63.1,47.39 63.1,38.345 64.731,36.714 64.731,12.062 63.29,10.621 63.29,10.223 v1(62.572,9.505)
  INNER2 w1.5: v1(30.682,26.093) 32.807,26.093 33.6,25.3 39.227,25.3 42.064,28.137 45.265,28.137 47.383,26.019 v1(47.383,25.992)
  BOTTOM w0.5: J9.57@61.097,9.525 v1@62.552,9.525
  BOTTOM w0.7: TP20.X@46.79,26.67 47.383,26.077 47.383,24.134 47.376,24.127 47.376,19.627 54.687,12.316 54.687,11.666 55.082,11.271 55.082,7.241 56.111,6.212 57.982,6.212 58.911,5.283 v1(62.832,5.283) ; v1@62.552,9.525 v1(62.572,9.505)
VCOIN: J9.59 J10.2 JMISC_MALE.59 | length 53.3
  TOP w0.5: JMISC_MALE.59@60.682,8.255 62.067,8.255 62.678,7.644 62.678,7.35 v1(62.697,7.331)
  INNER2 w0.7: J10.2@60.96,52.07 64.139,48.891 64.139,38.968 65.751,37.356 65.751,10.504 64.934,9.687 v1(64.934,9.661)
  BOTTOM w0.5: J9.59@60.29,8.255 61.797,8.255 v1@62.503,7.549
  BOTTOM w0.7: v1(62.697,7.331) 62.697,7.743 64.615,9.661 v1(64.934,9.661)
pads on no net: Fiducial_1.1 Fiducial_2.1 Fiducial_3.1 Fiducial_4.1 Fiducial_5.1 Fiducial_6.1 J4.17 J4.18 J5.1 J5.3 J5.10 J5.11 J5.12 J6.11 J6.12 J7.1 J7.10 J7.11 J7.12 J8.FIXING_PLASTIC_PIN J9.FIXING_PLASTIC_PIN

## Polygon pours and split planes (outlines as drawn)
GND on INNER2 "GND_L03_P004" (solid, remove dead copper, pour order 4): 0,1 0,52.34 cw(c1,52.34) 1,53.34 64.516,53.34 66.04,51.816 66.04,40.386 68.58,37.846 68.58,5.08 66.04,2.54 66.04,1 cw(c65.04,1) 65.04,0 1,0 cw(c1,1)
PWR_3P3V on INNER2 "PWR_3P3V_L03_P002" (solid, remove dead copper, pour order 2): 0,9 13,9 14.264,10.264 14.264,19.4 14.264,21.311 15.4,22.5 21.2,22.5 24.5,19.4 36.5,19.4 38.1,17.8 38.1,13.1 41.515,10.285 41.515,7.3 44.5,4.315 44.5,0 68.58,0 68.58,53.34 31,53.34 31,38.7 9.4,38.7 9.4,53.34 0,53.34 0,40.8
GND on BOTTOM "GND_L04_P008" (solid, remove dead copper, pour order 8): 0,1 0,52.34 cw(c1,52.34) 1,53.34 64.516,53.34 66.04,51.816 66.04,40.386 68.58,37.846 68.58,5.08 66.04,2.54 66.04,1 cw(c65.04,1) 65.04,0 1,0 cw(c1,1)
PWR_3P3V on BOTTOM "PWR_3P3V_L04_P003" (solid, remove dead copper, pour order 3): 39.4,5.08 44,5.08 44,9.4 41.425,9.4 41.425,7.2 40.285,7.2 39.4,7.2
GND on INNER1 "GND_L02_P001" (solid, remove dead copper, pour order 1): 0,1 0,52.34 cw(c1,52.34) 1,53.34 64.516,53.34 66.04,51.816 66.04,40.386 68.58,37.846 68.58,5.08 66.04,2.54 66.04,1 cw(c65.04,1) 65.04,0 1,0 cw(c1,1)
GND on TOP "GND_L01_P005" (solid, remove dead copper, pour order 5): 0,1 0,52.34 cw(c1,52.34) 1,53.34 64.516,53.34 66.04,51.816 66.04,40.386 68.58,37.846 68.58,5.08 66.04,2.54 66.04,1 cw(c65.04,1) 65.04,0 1,0 cw(c1,1)

## Other copper
TOP:
  pour cut-out: 0,53.34 24.299,53.34 24.299,44.501 26.9,41.9 26.9,21.4 27.1,21.2 27.1,20.1 27.9,19.3 33.9,19.3 38.7,14.198 38.7,12.074 36.785,10.159 36.785,0 27.5,0 0,0
BOTTOM:
  pour cut-out: 24,16.8 24.7,17.5 34.8,17.5 40.7,11.6 40.7,7.785 37.2,4.285 37.2,1.262 35.938,0 19.748,0 19.748,5.041 19.787,5.08 22.28,5.08 24,6.8
  pour cut-out: 0,0 0,4.561 4.939,4.561 7.6,1.9 11.7,1.9 12.7,2.9 12.7,7.1 12.9,7.3 14.8,7.3 14.8,22.3 15.8,23.3 19.5,23.3 22.464,20.336 22.464,11.564 19.763,8.863 19.763,0.011 19.752,0
  pour cut-out: 16.9,40.1 15.6,41.4 15.6,50.9 17.2,52.5 23.9,52.5 24.4,52 24.4,44.4 26.2,42.6 26.2,41 25.3,40.1

## Silkscreen, mask and mechanical layers (free items; w line width, h text height)
Route Tool Path:
  drawing of 169 lines, arcs and shapes, not listed
Board:
  lines w0.05: 1,53.34 ccw(c1,52.34) 0,52.34 0,1 ccw(c1,1) 1,0 ; 1,53.34 31.14,53.34 cw(c31.14,53.34) 31.14,53.34 ; 37.44,53.34 46.14,53.34 ; 46.14,0 1,0 ; 52.44,0 65.04,0 ; 52.44,53.34 64.516,53.34 ; 1,0 ccw(c1,0) 1,0 ; 64.516,53.34 ccw(c64.516,53.34) 64.516,53.34 ; 64.516,53.34 66.04,51.816 ; 64.516,53.34 66.04,51.816 ; 65.04,0 ccw(c65.04,0) 65.04,0 ; 65.04,0 ccw(c65.04,1) 66.04,1 ; 66.04,1 66.04,2.54 ; 66.04,1 66.04,2.54 ; 66.04,2.54 68.58,5.08 ; 66.04,2.54 68.58,5.08 ; 66.04,40.386 66.04,51.816 ; 66.04,40.386 66.04,51.816 ; 66.04,40.386 68.58,37.846 ; 66.04,40.386 68.58,37.846 ; 68.58,5.08 68.58,37.846 ; 68.58,5.08 68.58,37.846
Top Courtyard:
  circle w0.05: c38.628,26.67 r0.709